# EAGLE board pck100clone (EAGLE 6.6.0)
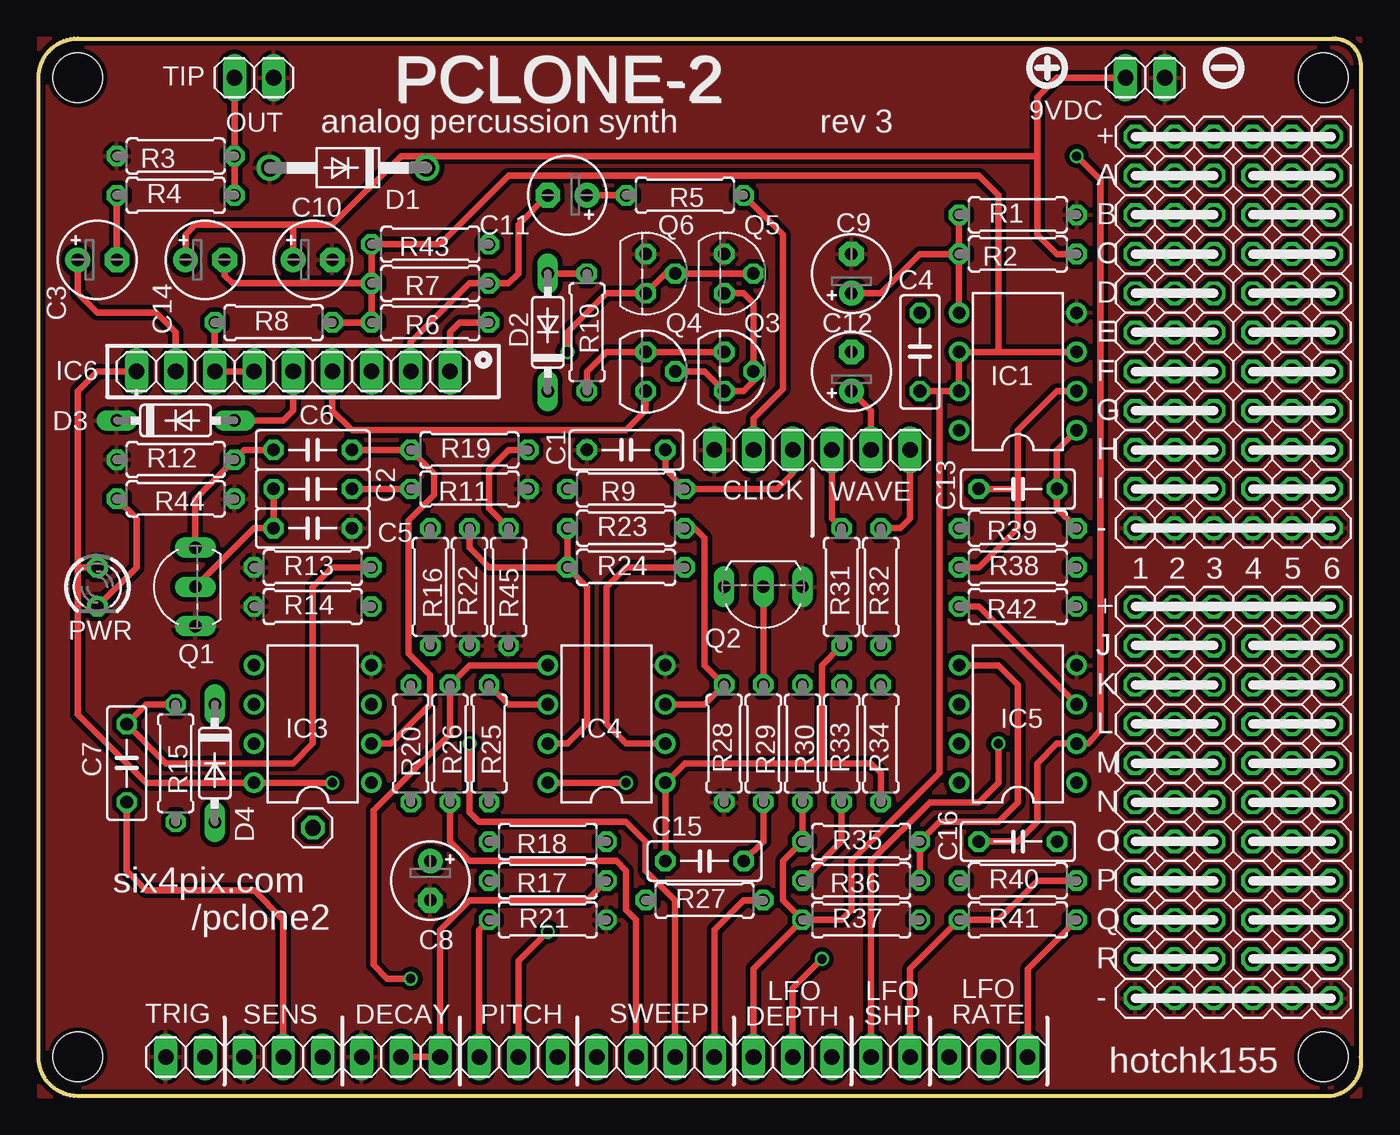
[diagram p0: board, top side]
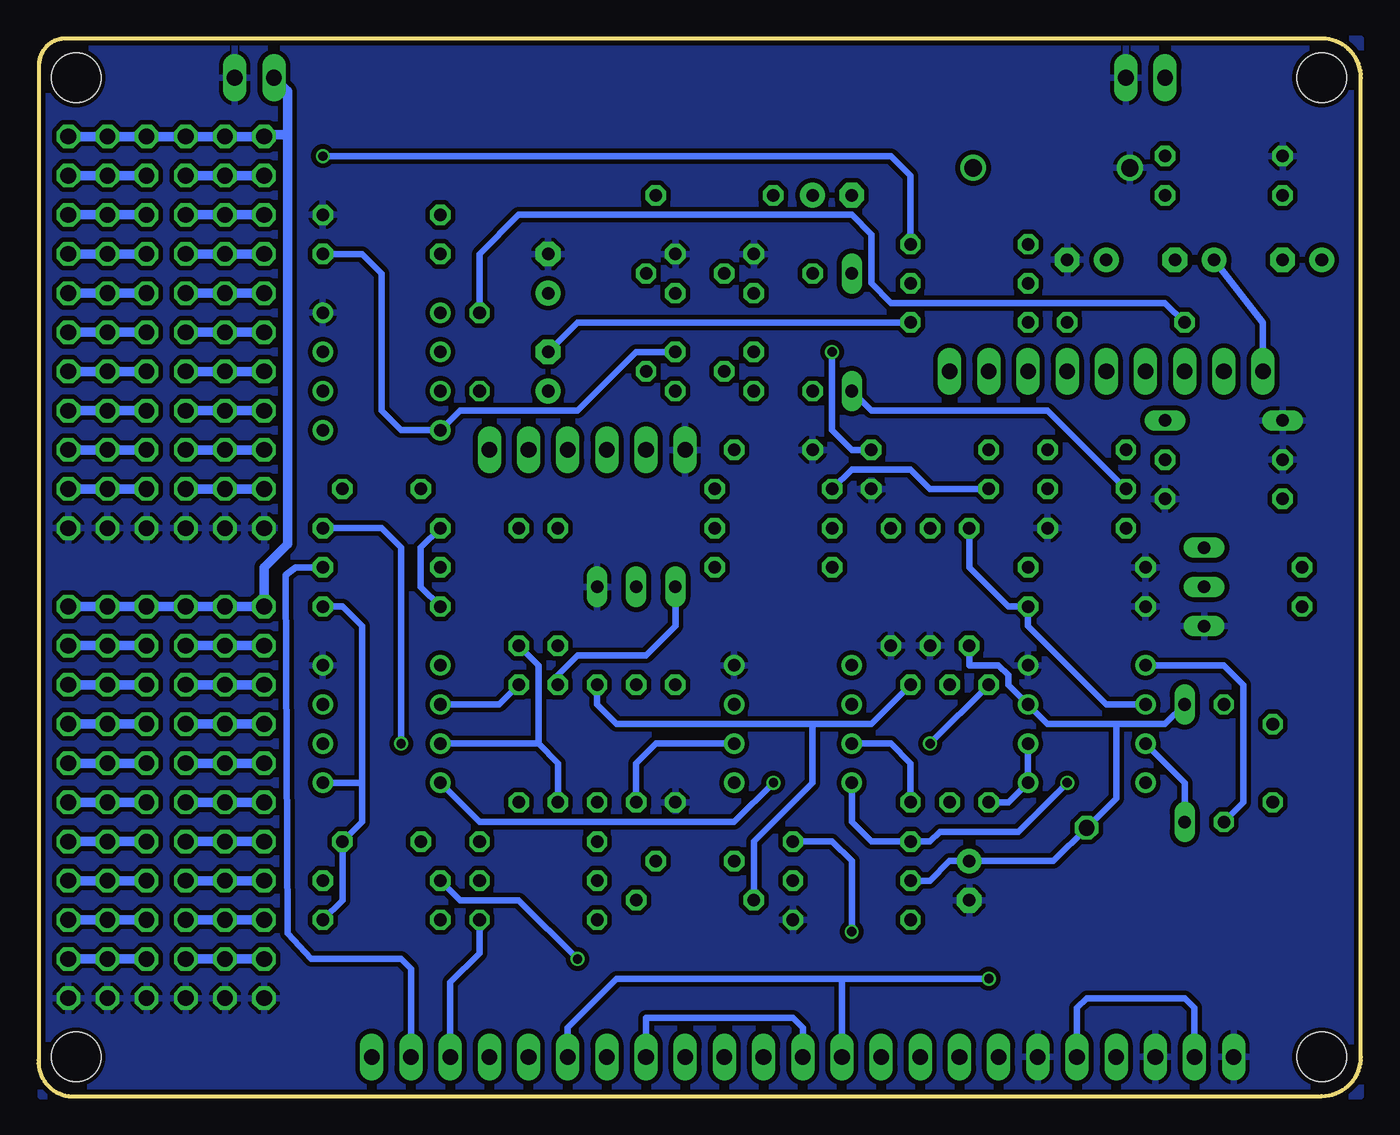
[diagram p1: board, bottom side, seen from below]

Size 85.75 x 68.58 mm. Coordinates in mm from the lower left corner, seen from the top.
Outline: 2.54,68.58 83.95,68.58 arc-90 85.72,66.93 85.72,2.54 arc-90 83.82,0 2.54,0 arc-90 0,2.54 0,66.04 arc-90 2.54,68.58
Copper layers (1*16): Top 0.035mm / dielectric 1.5mm / Bottom 0.035mm
Design rules "ITEADstudio_DRC": minimum track width 6mil, minimum drill 12mil, track to track 6mil, track to pad 6mil, pad to pad 6mil, via to via 6mil, smd to smd 0mil, copper to edge 10mil, drill to drill 10mil, minimum pad ring 10mil, minimum via ring 6mil, stop-mask expansion 2mil, vias tented up to drill 100mil, thermal gap 10mil
Holes 3.2 mm at 83.31,66.04 83.31,2.54 2.54,2.54 2.54,66.04

## Footprints (pad centres in the part's own frame; a part is rotated, then mirrored left to right if it is on the bottom)
1X02 = drill 1.016 long: 1 -1.27,0; 2 1.27,0
C050-025X075 = drill 0.813 octagon: 1 -2.54,0; 2 2.54,0
E2,5-5 = drill 0.813 pad 1.6: + -1.27,0 | drill 0.813 pad 1.6 octagon: - 1.27,0
1X03 = drill 1.016 long: 1 -2.54,0; 2 0,0; 3 2.54,0
DO41-10 = drill 1.118: A 5.08,0; C -5.08,0
DO35-7 = drill 0.813 long: A 3.81,0; C -3.81,0
DIL08 = drill 0.813 pad 1.27: 1 -3.81,-3.81; 2 -1.27,-3.81; 3 1.27,-3.81; 4 3.81,-3.81; 5 3.81,3.81; 6 1.27,3.81; 7 -1.27,3.81; 8 -3.81,3.81
1X09 = drill 1.016 long: 1 -10.16,0; 2 -7.62,0; 3 -5.08,0; 4 -2.54,0; 5 0,0; 6 2.54,0; 7 5.08,0; 8 7.62,0; 9 10.16,0
1X01 = drill 1.016 octagon: 1 0,0
LED3MM = drill 0.813 octagon: A -1.27,0; K 1.27,0
TO92-ECB = drill 0.813 long: B 2.54,0; C 0,0; E -2.54,0
TO92 = drill 0.813 octagon: 1 1.27,0; 2 0,1.905; 3 -1.27,0
0207/7 = drill 0.813 octagon: 1 -3.81,0; 2 3.81,0
1X04 = drill 1.016 long: 1 -3.81,0; 2 -1.27,0; 3 1.27,0; 4 3.81,0

## Placement (x,y rotation side)
9VDC  [1X02]  71.75,66.04 0 top
C1  .047  [C050-025X075]  38.1,41.91 0 top
C2  .047  [C050-025X075]  17.78,39.37 180 top
C3  1/50  [E2,5-5]  3.81,54.23 0 top
C4  .001  [C050-025X075]  57.15,48.26 90 top
C5  .001  [C050-025X075]  17.78,36.83 180 top
C6  .047  [C050-025X075]  17.78,41.91 180 top
C7  .001  [C050-025X075]  5.71,21.59 90 top
C8  2.2/50  [E2,5-5]  25.4,13.97 270 top
C9  10/16  [E2,5-5]  52.7,53.34 90 top
C10  100/16  [E2,5-5]  17.78,54.23 0 top
C11  1/50  [E2,5-5]  34.29,58.42 180 top
C12  1/50  [E2,5-5]  52.7,46.99 90 top
C13  .022  [C050-025X075]  63.5,39.37 0 top
C14  100/16  [E2,5-5]  10.79,54.23 0 top
C15  .001  [C050-025X075]  43.18,15.24 0 top
C16  .0033  [C050-025X075]  63.5,16.51 0 top
CLICK  [1X03]  46.35,41.91 180 top
D1  1N4004  [DO41-10]  20.07,60.2 180 top
D2  1N4148DO35-7  [DO35-7]  33.02,49.53 90 top
D3  1N4148DO35-7  [DO35-7]  8.89,43.81 0 top
D4  1N4148DO35-7  [DO35-7]  11.43,21.59 270 top
DECAY  [1X03]  23.49,2.54 0 top
DEPTH  [1X03]  48.89,2.54 180 top
IC1  LM358N  [DIL08]  63.5,46.99 90 top
IC3  LM358N  [DIL08]  17.78,24.13 90 top
IC4  LM358N  [DIL08]  36.83,24.13 90 top
IC5  LM358N  [DIL08]  63.5,24.13 90 top
IC6  [1X09]  16.51,46.99 180 top
JP1  [1X01]  17.78,17.4 0 top
JP2  [1X01]  73.66,31.75 0 top
JP3  [1X01]  76.2,31.75 0 top
JP4  [1X01]  76.2,29.21 0 top
JP5  [1X01]  71.12,29.21 0 top
JP6  [1X01]  73.66,29.21 0 top
JP7  [1X01]  71.12,31.75 0 top
JP14  [1X01]  73.66,49.53 0 top
JP15  [1X01]  76.2,49.53 0 top
JP16  [1X01]  81.28,46.99 0 top
JP17  [1X01]  83.82,46.99 0 top
JP18  [1X01]  78.74,46.99 0 top
JP19  [1X01]  71.12,49.53 0 top
JP20  [1X01]  73.66,44.45 0 top
JP21  [1X01]  76.2,44.45 0 top
JP22  [1X01]  78.74,49.53 0 top
JP23  [1X01]  81.28,49.53 0 top
JP24  [1X01]  83.82,49.53 0 top
JP25  [1X01]  71.12,44.45 0 top
JP26  [1X01]  78.74,44.45 0 top
JP27  [1X01]  81.28,44.45 0 top
JP28  [1X01]  71.12,46.99 0 top
JP29  [1X01]  73.66,46.99 0 top
JP30  [1X01]  76.2,46.99 0 top
JP31  [1X01]  83.82,44.45 0 top
JP32  [1X01]  71.12,41.91 0 top
JP33  [1X01]  73.66,41.91 0 top
JP34  [1X01]  76.2,41.91 0 top
JP35  [1X01]  78.74,41.91 0 top
JP36  [1X01]  81.28,41.91 0 top
JP37  [1X01]  83.82,41.91 0 top
JP38  [1X01]  76.2,39.37 0 top
JP39  [1X01]  71.12,39.37 0 top
JP40  [1X01]  73.66,39.37 0 top
JP41  [1X01]  78.74,39.37 0 top
JP42  [1X01]  81.28,39.37 0 top
JP43  [1X01]  83.82,39.37 0 top
JP44  [1X01]  81.28,31.75 0 top
JP45  [1X01]  83.82,31.75 0 top
JP46  [1X01]  78.74,31.75 0 top
JP47  [1X01]  71.12,36.83 0 top
JP48  [1X01]  73.66,36.83 0 top
JP49  [1X01]  78.74,36.83 0 top
JP50  [1X01]  81.28,36.83 0 top
JP51  [1X01]  83.82,36.83 0 top
JP52  [1X01]  76.2,36.83 0 top
JP53  [1X01]  78.74,29.21 0 top
JP54  [1X01]  81.28,29.21 0 top
JP55  [1X01]  83.82,29.21 0 top
JP56  [1X01]  78.74,59.69 0 top
JP57  [1X01]  81.28,59.69 0 top
JP58  [1X01]  71.12,62.23 0 top
JP59  [1X01]  73.66,62.23 0 top
JP60  [1X01]  76.2,62.23 0 top
JP61  [1X01]  83.82,59.69 0 top
JP62  [1X01]  78.74,57.15 0 top
JP63  [1X01]  81.28,57.15 0 top
JP64  [1X01]  71.12,59.69 0 top
JP65  [1X01]  73.66,59.69 0 top
JP66  [1X01]  76.2,59.69 0 top
JP67  [1X01]  83.82,57.15 0 top
JP68  [1X01]  78.74,54.61 0 top
JP69  [1X01]  81.28,54.61 0 top
JP70  [1X01]  73.66,57.15 0 top
JP71  [1X01]  71.12,57.15 0 top
JP72  [1X01]  76.2,57.15 0 top
JP73  [1X01]  83.82,54.61 0 top
JP74  [1X01]  78.74,52.07 0 top
JP75  [1X01]  81.28,52.07 0 top
JP76  [1X01]  83.82,52.07 0 top
JP77  [1X01]  71.12,54.61 0 top
JP78  [1X01]  73.66,54.61 0 top
JP79  [1X01]  76.2,54.61 0 top
JP80  [1X01]  73.66,52.07 0 top
JP81  [1X01]  71.12,52.07 0 top
JP82  [1X01]  81.28,8.89 0 top
JP83  [1X01]  83.82,8.89 0 top
JP84  [1X01]  76.2,19.05 0 top
JP85  [1X01]  76.2,8.89 0 top
JP86  [1X01]  71.12,8.89 0 top
JP87  [1X01]  73.66,8.89 0 top
JP88  [1X01]  71.12,19.05 0 top
JP89  [1X01]  78.74,8.89 0 top
JP90  [1X01]  81.28,6.35 0 top
JP91  [1X01]  83.82,6.35 0 top
JP92  [1X01]  73.66,19.05 0 top
JP93  [1X01]  76.2,6.35 0 top
JP94  [1X01]  71.12,6.35 0 top
JP95  [1X01]  73.66,6.35 0 top
JP96  [1X01]  78.74,19.05 0 top
JP97  [1X01]  78.74,6.35 0 top
JP98  [1X01]  71.12,13.97 0 top
JP99  [1X01]  73.66,13.97 0 top
JP100  [1X01]  83.82,19.05 0 top
JP101  [1X01]  83.82,13.97 0 top
JP102  [1X01]  78.74,13.97 0 top
JP103  [1X01]  81.28,13.97 0 top
JP104  [1X01]  81.28,19.05 0 top
JP105  [1X01]  76.2,13.97 0 top
JP106  [1X01]  73.66,11.43 0 top
JP107  [1X01]  76.2,11.43 0 top
JP108  [1X01]  76.2,21.59 0 top
JP109  [1X01]  83.82,11.43 0 top
JP110  [1X01]  81.28,11.43 0 top
JP111  [1X01]  78.74,11.43 0 top
JP112  [1X01]  71.12,21.59 0 top
JP113  [1X01]  71.12,11.43 0 top
JP114  [1X01]  78.74,16.51 0 top
JP115  [1X01]  81.28,16.51 0 top
JP116  [1X01]  73.66,21.59 0 top
JP117  [1X01]  76.2,16.51 0 top
JP118  [1X01]  71.12,16.51 0 top
JP119  [1X01]  73.66,16.51 0 top
JP120  [1X01]  71.12,24.13 0 top
JP121  [1X01]  83.82,16.51 0 top
JP122  [1X01]  73.66,24.13 0 top
JP123  [1X01]  76.2,24.13 0 top
JP124  [1X01]  78.74,21.59 0 top
JP125  [1X01]  81.28,21.59 0 top
JP126  [1X01]  83.82,21.59 0 top
JP127  [1X01]  78.74,26.67 0 top
JP128  [1X01]  81.28,26.67 0 top
JP129  [1X01]  73.66,26.67 0 top
JP130  [1X01]  76.2,26.67 0 top
JP131  [1X01]  71.12,26.67 0 top
JP132  [1X01]  83.82,26.67 0 top
JP133  [1X01]  81.28,24.13 0 top
JP134  [1X01]  83.82,24.13 0 top
JP135  [1X01]  78.74,24.13 0 top
JP136  [1X01]  76.2,52.07 0 top
JP143  [1X01]  81.28,62.23 0 top
JP144  [1X01]  83.82,62.23 0 top
JP145  [1X01]  78.74,62.23 0 top
OUT  [1X02]  13.97,66.04 0 top
PITCH  [1X03]  31.12,2.54 0 top
PWR  [LED3MM]  3.81,33.02 270 top
Q1  2SC945  [TO92-ECB]  10.16,33.02 90 top
Q2  2SC945  [TO92-ECB]  46.99,33.02 180 top
Q3  2N3906  [TO92]  44.45,46.99 270 top
Q4  2N3906  [TO92]  39.37,46.99 270 top
Q5  2N3904  [TO92]  44.45,53.34 270 top
Q6  2N3904  [TO92]  39.37,53.34 270 top
R1  47k  [0207/7]  63.5,57.15 0 top
R2  47k  [0207/7]  63.5,54.61 180 top
R3  10k  [0207/7]  8.89,60.96 180 top
R4  47k  [0207/7]  8.89,58.42 0 top
R5  47k  [0207/7]  41.91,58.42 180 top
R6  1k  [0207/7]  25.4,50.16 180 top
R7  1k  [0207/7]  25.4,52.7 180 top
R8  33k  [0207/7]  15.24,50.16 0 top
R9  100k  [0207/7]  38.1,39.37 180 top
R10  1m  [0207/7]  35.56,49.53 270 top
R11  100k  [0207/7]  27.94,39.37 180 top
R12  100k  [0207/7]  8.89,41.27 0 top
R13  22k  [0207/7]  17.78,34.29 0 top
R14  4k7  [0207/7]  17.78,31.75 0 top
R15  10k  [0207/7]  8.89,21.59 270 top
R16  4m7  [0207/7]  25.4,33.02 270 top
R17  1k  [0207/7]  33.02,13.97 180 top
R18  56k  [0207/7]  33.02,16.51 180 top
R19  33k  [0207/7]  27.94,41.91 0 top
R20  4k7  [0207/7]  24.13,22.86 270 top
R21  1k  [0207/7]  33.02,11.43 0 top
R22  4k7  [0207/7]  27.94,33.02 90 top
R23  47k  [0207/7]  38.1,36.83 0 top
R24  100k  [0207/7]  38.1,34.29 0 top
R25  100k  [0207/7]  29.21,22.86 270 top
R26  22k  [0207/7]  26.67,22.86 270 top
R27  22k  [0207/7]  43.18,12.7 0 top
R28  47k  [0207/7]  44.45,22.86 90 top
R29  47k  [0207/7]  46.99,22.86 270 top
R30  100k  [0207/7]  49.53,22.86 270 top
R31  100k  [0207/7]  52.07,33.02 90 top
R32  220k  [0207/7]  54.61,33.02 90 top
R33  47k  [0207/7]  52.07,22.86 90 top
R34  47k  [0207/7]  54.61,22.86 90 top
R35  100k  [0207/7]  53.34,16.51 0 top
R36  100k  [0207/7]  53.34,13.97 180 top
R37  330  [0207/7]  53.34,11.43 180 top
R38  47k  [0207/7]  63.5,34.29 0 top
R39  22k  [0207/7]  63.5,36.83 180 top
R40  100k  [0207/7]  63.5,13.97 0 top
R41  47k  [0207/7]  63.5,11.43 0 top
R42  47k  [0207/7]  63.5,31.75 180 top
R43  22k  [0207/7]  25.4,55.24 180 top
R44  4k7  [0207/7]  8.89,38.73 180 top
R45  4k7  [0207/7]  30.48,33.02 270 top
RATE  [1X03]  61.59,2.54 180 top
SENS  [1X03]  15.88,2.54 180 top
SHP  [1X02]  55.25,2.54 0 top
SWEEP  [1X04]  40.01,2.54 0 top
TRIG  [1X02]  9.52,2.54 0 top
WAVE  [1X03]  53.98,41.91 0 top

## Library data of the parts
9VDC CLICK DECAY DEPTH IC6 JP1-JP7 JP14-JP136 JP143-JP145 OUT PITCH RATE SENS SHP SWEEP TRIG WAVE = pinhead
C1-C16 R1-R45 = rcl
D1-D4 = diode
IC1 IC3-IC5 = linear
PWR = led
Q1 Q2 Q5 Q6 = transistor
Q3 Q4 = transistor-pnp

## Nets
ATTACK_OUT: CLICK.2 R5.1
BA662_1: Q5.2 Q6.1 Q6.2 R19.2 R45.1
BA662_2: C11.- IC6.2 R7.1
BA662_5: D3.A IC6.5
BA662_6_7: C4.2 IC6.6 IC6.7 R8.1
BA662_8: C3.+ IC6.8
GND: 9VDC.2 C1.1 C5.1 C8.- C9.- C10.- CLICK.3 D1.A D3.C DECAY.1 IC1.4 IC3.4 IC4.4 IC5.4 JP47.1 JP48.1 JP49.1 JP50.1 JP51.1 JP52.1 JP90.1 JP91.1 JP93.1 JP94.1 JP95.1 JP97.1 OUT.2 Q1.E Q2.E Q5.3 Q6.3 R1.2 R3.2 R11.1 R12.1 R13.1 R14.1 R21.2 R22.1 R28.1 R44.1 R45.2 SENS.3 TRIG.1
MOD_OUT: R40.2 R41.1 SHP.2
N$1: SENS.1 TRIG.2
N$3: C7.1 SENS.2
N$4: C7.2 R13.2 R15.1
N$5: IC3.5 R15.2
N$6: IC3.6 R14.2 R16.1
N$7: D4.A IC3.7
N$8: C8.+ D4.C IC3.3 JP1.1 R16.2 R17.2
N$9: DECAY.2 DECAY.3 R17.1
N$10: C6.2 Q1.B R12.2
N$11: C2.2 C5.2 D2.C Q1.C
N$12: D2.A R10.1
N$13: C2.1 R9.2 R11.2
N$14: C1.2 CLICK.1 R9.1
N$15: C13.2 IC1.1 R39.1 SHP.1
N$16: C13.1 IC1.2 R38.1
N$17: R38.2 RATE.2
N$18: JP4.1 JP5.1 JP6.1
N$19: C16.1 IC5.2 R43.1
N$20: C16.2 IC5.1 R41.2 R42.1 RATE.1
N$21: R20.1 SWEEP.3
N$22: R37.1 RATE.3
N$23: IC5.3 R39.2 R42.2
N$24: R27.2 SWEEP.4
N$25: R26.2 SWEEP.2
N$26: IC4.6 R25.1 R27.1 R30.1
N$27: DEPTH.1 IC4.5 PITCH.3 R26.1
N$28: DEPTH.2 R40.1
N$29: PITCH.2 R18.1
N$30: PITCH.1 R21.1
N$31: C9.+ IC1.5 R1.1 R2.2
N$32: IC4.7 R22.2 R23.1 R24.1 R25.2
N$33: IC4.3 R23.2 R28.2
N$34: C15.2 IC4.2 R24.2 R29.2
N$35: Q2.C R29.1
N$36: Q2.B R33.2
N$37: C15.1 IC4.1 R31.1 R34.1
N$38: IC5.6 R34.2
N$39: R31.2 WAVE.1
N$40: IC5.7 R32.1 R33.1 R36.2
N$41: R32.2 WAVE.3
N$42: IC5.5 R35.2 R36.1
N$43: C12.+ WAVE.2
N$44: PWR.K R44.2
N$45: IC6.4 Q4.1
N$47: C11.+ R5.2
N$48: Q3.1 Q3.2 Q4.2 Q5.1
N$50: JP14.1 JP15.1 JP19.1
N$51: C3.- R4.1
N$52: JP16.1 JP17.1 JP18.1
N$53: JP20.1 JP21.1 JP25.1
N$54: JP22.1 JP23.1 JP24.1
N$55: JP26.1 JP27.1 JP31.1
N$56: JP28.1 JP29.1 JP30.1
N$57: JP32.1 JP33.1 JP34.1
N$58: JP35.1 JP36.1 JP37.1
N$59: JP38.1 JP39.1 JP40.1
N$60: JP41.1 JP42.1 JP43.1
N$64: JP53.1 JP54.1 JP55.1
N$65: JP56.1 JP57.1 JP61.1
N$67: JP62.1 JP63.1 JP67.1
N$68: JP64.1 JP65.1 JP66.1
N$69: JP68.1 JP69.1 JP73.1
N$70: JP70.1 JP71.1 JP72.1
N$71: JP74.1 JP75.1 JP76.1
N$72: JP77.1 JP78.1 JP79.1
N$73: JP80.1 JP81.1 JP136.1
N$89: JP98.1 JP99.1 JP105.1
N$90: JP82.1 JP83.1 JP89.1
N$91: JP85.1 JP86.1 JP87.1
N$92: JP101.1 JP102.1 JP103.1
N$93: JP106.1 JP107.1 JP113.1
N$94: JP109.1 JP110.1 JP111.1
N$95: JP114.1 JP115.1 JP121.1
N$96: JP117.1 JP118.1 JP119.1
N$97: JP84.1 JP88.1 JP92.1
N$98: JP96.1 JP100.1 JP104.1
N$99: JP108.1 JP112.1 JP116.1
N$100: JP120.1 JP122.1 JP123.1
N$101: JP124.1 JP125.1 JP126.1
N$102: JP127.1 JP128.1 JP132.1
N$103: JP129.1 JP130.1 JP131.1
N$104: JP133.1 JP134.1 JP135.1
OUT: OUT.1 R3.1 R4.2
TRIGGER: C6.1 IC3.1 IC3.2 R19.1 R20.2
VCC: 9VDC.1 C10.+ C14.+ D1.C IC1.8 IC3.8 IC4.8 IC5.8 IC6.9 JP2.1 JP3.1 JP7.1 JP44.1 JP45.1 JP46.1 JP58.1 JP59.1 JP60.1 JP143.1 JP144.1 JP145.1 PWR.A Q3.3 Q4.3 R2.1 R10.2 R18.2
VCO_OUT: C12.- IC6.1 R6.1
VGND: C4.1 C14.- DEPTH.3 IC1.3 IC1.6 IC1.7 R6.2 R7.2 R8.2 R30.2 R35.1 R37.2 R43.2 SWEEP.1

## Tracks (layer width: path | path; a pad name or v marks a point on that pad's centre or on a via)
ATTACK_OUT
  Top 0.406: R5.1 48.26,55.88 48.26,45.85 46.35,43.94 CLICK.2
BA662_1  (via drill 0.6)
  Top 0.406: Q5.2 Q6.2 40.64,53.34 Q6.1 36.83,52.07 34.29,49.53 v34.29,48.26 | R19.2 30.48,41.91 29.21,40.64 29.21,38.1 R45.1
  Bottom 0.406: R19.2 33.02,41.91 34.29,43.18 v34.29,48.26
BA662_2
  Top 0.406: IC6.2 24.13,48.89 27.94,52.7 R7.1 30.48,52.7 31.12,53.34 31.12,56.51 C11.-
BA662_5
  Top 0.406: D3.A 15.88,43.81 16.51,44.45 IC6.5
BA662_6_7
  Top 0.406: R8.1 IC6.7 IC6.6
  Bottom 0.406: C4.2 57.15,54.61 54.61,57.15 33.02,57.15 31.75,55.88 31.75,52.7 30.48,51.43 12.7,51.43 R8.1
BA662_8
  Top 0.406: IC6.8 8.89,49.53 7.62,50.8 3.81,50.8 2.54,52.07 C3.+
GND
  pour Bottom (isolate 0.305): 0,68.58 85.72,68.58 85.6,0 0,0
  pour Top (isolate 0.305): 0,68.58 0,0 85.72,0 85.72,68.58
MOD_OUT
  Top 0.406: R40.2 64.77,13.97 62.23,11.43 R41.1 56.52,8.26 SHP.2
N$1
  Bottom 0.406: TRIG.2 10.79,5.71 11.43,6.35 17.78,6.35 18.41,5.71 SENS.1
N$3
  Top 0.406: C7.1 5.71,14.61 6.98,13.34 13.97,13.34 15.88,11.43 SENS.2
N$4
  Top 0.406: R15.1 6.98,25.4 C7.2 8.25,21.59 16.51,21.59 17.78,22.86 17.78,33.02 19.05,34.29 R13.2
N$5
  Bottom 0.406: IC3.5 8.89,27.94 7.62,26.67 7.62,19.05 R15.2
N$6
  Bottom 0.406: IC3.6 16.51,25.4 21.59,30.48 R14.2 22.86,31.75 25.4,34.29 R16.1
N$7
  Bottom 0.406: D4.A 11.43,20.32 IC3.7
N$8
  Bottom 0.406: 15.88,24.13 20.32,24.13 IC3.3 22.86,26.67 22.86,27.3 23.49,27.94 25.4,27.94 R16.2 | 15.88,24.13 12.7,24.13 D4.C | R17.2 27.94,13.97 26.67,15.24 C8.+ 19.94,15.24 JP1.1 15.88,19.3 15.88,24.13
N$9
  Top 0.406: DECAY.2 DECAY.3 26.03,10.79 27.94,12.7 35.56,12.7 R17.1
N$10
  Top 0.406: C6.2 13.34,41.91 R12.2 10.16,38.73 Q1.B
N$11
  Top 0.406: C2.2 C5.2 13.97,36.83 Q1.C
  Bottom 0.406: C2.2 20.32,44.45 31.75,44.45 D2.C
N$12
  Top 0.406: D2.A R10.1
N$13
  Top 0.406: C2.1 R11.2
  Bottom 0.406: R11.2 27.94,39.37 29.21,40.64 33.02,40.64 R9.2
N$14
  Top 0.406: C1.2 40.64,40.64 R9.1 47.88,39.37 48.89,40.39 CLICK.1
N$15  (via drill 0.6)
  Top 0.406: v62.23,22.86 62.23,20.32 60.96,19.05 57.78,19.05 53.98,15.24 SHP.1 | R39.1 66.04,38.1 C13.2 66.04,41.91 IC1.1
  Bottom 0.406: v62.23,22.86 62.23,35.56 63.5,36.83 R39.1
N$16
  Top 0.406: R38.1 60.96,34.29 63.5,36.83 63.5,39.37 | 63.5,39.37 63.5,43.18 66.04,45.72 IC1.2 | C13.1 63.5,39.37
N$17
  Bottom 0.406: R38.2 69.09,34.29 69.72,33.78 69.6,10.54 68.07,8.89 62.23,8.89 61.59,8.26 RATE.2
N$18
  Bottom 0.61: JP5.1 JP6.1 JP4.1
N$19  (via drill 0.6)
  Top 0.406: C16.1 63.5,16.51 64.77,17.78 64.77,21.59 66.04,22.86 IC5.2 68.07,22.86 68.83,23.75 68.83,59.44 v67.31,60.96
  Bottom 0.406: v67.31,60.96 30.48,60.96 29.21,59.69 R43.1
N$20
  Top 0.406: RATE.1 64.14,8.26 R41.2
  Bottom 0.406: 64.77,20.32 64.77,17.78 C16.2 66.04,12.7 R41.2 | 64.77,20.32 64.77,30.48 66.04,31.75 R42.1 | IC5.1 64.77,20.32
N$21  (via drill 0.6)
  Top 0.406: v27.94,22.86 27.94,18.41 28.58,17.78 38.1,17.78 39.37,16.51 39.37,14.61 41.27,12.7 SWEEP.3
  Bottom 0.406: v27.94,22.86 R20.1
N$22
  Bottom 0.406: RATE.3 59.05,7.37 57.15,9.27 R37.1
N$23
  Top 0.406: R42.2 60.96,31.75 IC5.3
  Bottom 0.406: R42.2 60.96,33.02 60.96,35.56 R39.2
N$24
  Top 0.406: SWEEP.4 43.81,10.79 45.72,12.7 R27.2
N$25
  Top 0.406: R26.2 26.67,16.51 27.94,15.24 37.46,15.24 38.1,14.61 38.1,12.07 38.73,11.43 SWEEP.2
N$26
  Top 0.406: IC4.6 30.48,25.4 R25.1
  Bottom 0.406: R25.1 31.75,24.13 35.56,24.13 | R30.1 49.53,25.4 48.26,24.13 35.56,24.13 | R27.1 39.37,16.51 35.56,20.32 35.56,24.13
N$27  (via drill 0.6)
  Top 0.406: IC4.5 27.94,27.94 R26.1 26.67,23.5 21.72,18.54 21.72,8.51 22.61,7.62 v24.13,7.62
  Bottom 0.406: DEPTH.1 51.44,4.45 48.26,7.62 33.66,7.62 | 33.66,7.62 v24.13,7.62 | PITCH.3 33.66,7.62
N$28  (via drill 0.6)
  Top 0.406: DEPTH.2 48.89,6.99 v50.8,8.89
  Bottom 0.406: R40.1 58.42,12.7 54.61,12.7 v50.8,8.89
N$29  (via drill 0.6)
  Top 0.406: PITCH.2 31.12,8.76 31.5,9.14 v33.02,10.67
  Bottom 0.406: R18.1 34.29,16.51 33.02,15.24 v33.02,10.67
N$30
  Top 0.406: R21.1 28.58,10.79 PITCH.1
N$31
  Top 0.406: R2.2 IC1.5 | R2.2 R1.1 | C9.+ 54.61,52.07 57.15,54.61 R2.2
N$32
  Top 0.406: IC4.7 34.29,22.86 35.56,24.13 35.56,33.02 R24.1 | R23.1 R24.1 | R22.2 27.94,35.56 29.21,34.29 R24.1
  Bottom 0.406: R25.2 29.21,21.59 30.48,22.86 IC4.7
N$33
  Top 0.406: IC4.3 43.18,25.4 R28.2 43.18,27.94 43.18,36.2 42.55,36.83 R23.2
N$34
  Top 0.406: R29.2 46.99,16.51 C15.2 | R24.2 38.1,34.29 36.83,33.02 36.83,24.13 38.1,22.86 IC4.2
  Bottom 0.406: IC4.2 45.72,22.86 46.99,21.59 R29.2
N$35
  Top 0.406: R29.1 Q2.C
N$36
  Bottom 0.406: Q2.B 44.45,30.48 46.35,28.57 50.8,28.57 52.07,27.3 R33.2
N$37
  Top 0.406: 50.8,21.59 41.91,21.59 IC4.1 C15.1 | 50.8,21.59 53.98,21.59 54.61,20.96 R34.1 | R31.1 50.8,27.94 50.8,21.59
N$38
  Bottom 0.406: IC5.6 55.88,25.4 R34.2
N$39
  Top 0.406: WAVE.1 51.44,37.46 R31.2
N$40
  Top 0.406: R33.1 52.07,16.51 R36.2
  Bottom 0.406: IC5.7 53.34,22.86 | 53.34,22.86 52.07,21.59 R33.1 | R32.1 53.34,27.94 53.34,22.86
N$41
  Top 0.406: WAVE.3 56.52,37.46 55.88,36.83 R32.2
N$42
  Top 0.406: R36.1 R35.2 58.42,17.78 62.23,17.78 63.5,19.05 63.5,26.67 62.23,27.94 IC5.5
N$43
  Top 0.406: WAVE.2 53.98,44.45 C12.+
N$44
  Top 0.406: PWR.K 6.35,34.29 6.35,37.46 R44.2
N$45
  Top 0.406: Q4.1 39.37,44.45 38.1,43.18 20.32,43.18 19.05,44.45 IC6.4
N$47
  Top 0.406: C11.+ R5.2
N$48
  Top 0.406: Q4.2 43.18,46.99 Q3.1 45.72,45.72 46.35,46.35 Q3.2 46.35,51.43 45.72,52.07 Q5.1
N$50
  Bottom 0.61: JP19.1 JP14.1 JP15.1
N$51
  Top 0.406: C3.- R4.1
N$52
  Bottom 0.61: JP18.1 JP16.1 JP17.1
N$53
  Bottom 0.61: JP25.1 JP20.1 JP21.1
N$54
  Bottom 0.61: JP22.1 JP23.1 JP24.1
N$55
  Bottom 0.61: JP26.1 JP27.1 JP31.1
N$56
  Bottom 0.61: JP28.1 JP29.1 JP30.1
N$57
  Bottom 0.61: JP32.1 JP33.1 JP34.1
N$58
  Bottom 0.61: JP35.1 JP36.1 JP37.1
N$59
  Bottom 0.61: JP39.1 JP40.1 JP38.1
N$60
  Bottom 0.61: JP41.1 JP42.1 JP43.1
N$64
  Bottom 0.61: JP53.1 JP54.1 JP55.1
N$65
  Bottom 0.61: JP56.1 JP57.1 JP61.1
N$67
  Bottom 0.61: JP62.1 JP63.1 JP67.1
N$68
  Bottom 0.61: JP64.1 JP65.1 JP66.1
N$69
  Bottom 0.61: JP68.1 JP69.1 JP73.1
N$70
  Bottom 0.61: JP71.1 JP70.1 JP72.1
N$71
  Bottom 0.61: JP74.1 JP75.1 JP76.1
N$72
  Bottom 0.61: JP77.1 JP78.1 JP79.1
N$73
  Bottom 0.61: JP81.1 JP80.1 JP136.1
N$89
  Bottom 0.61: JP98.1 JP99.1 JP105.1
N$90
  Bottom 0.61: JP89.1 JP82.1 JP83.1
N$91
  Bottom 0.61: JP86.1 JP87.1 JP85.1
N$92
  Bottom 0.61: JP102.1 JP103.1 JP101.1
N$93
  Bottom 0.61: JP113.1 JP106.1 JP107.1
N$94
  Bottom 0.61: JP111.1 JP110.1 JP109.1
N$95
  Bottom 0.61: JP114.1 JP115.1 JP121.1
N$96
  Bottom 0.61: JP118.1 JP119.1 JP117.1
N$97
  Bottom 0.61: JP88.1 JP92.1 JP84.1
N$98
  Bottom 0.61: JP96.1 JP104.1 JP100.1
N$99
  Bottom 0.61: JP112.1 JP116.1 JP108.1
N$100
  Bottom 0.61: JP120.1 JP122.1 JP123.1
N$101
  Bottom 0.61: JP124.1 JP125.1 JP126.1
N$102
  Bottom 0.61: JP127.1 JP128.1 JP132.1
N$103
  Bottom 0.61: JP131.1 JP129.1 JP130.1
N$104
  Bottom 0.61: JP135.1 JP133.1 JP134.1
OUT
  Top 0.406: R4.2 R3.1 OUT.1
TRIGGER
  Top 0.406: C6.1 R19.1 25.65,40.39 25.65,38.99 24,37.34 24,28.7 25.4,27.3 25.4,25.4 22.86,22.86 IC3.2
  Bottom 0.406: R20.2 22.86,19.05 IC3.1 IC3.2
VCC  (via drill 0.6)
  Top 0.406: Q3.3 Q4.3 36.83,48.26 35.56,46.99 R10.2 | IC6.9 3.81,46.99 2.54,45.72 2.54,34.29 | 16.51,56.51 10.16,56.51 9.52,55.88 C14.+ | 16.51,56.51 19.05,56.51 23.49,60.96 25.4,60.96 | 15.24,20.32 IC3.8 | PWR.A 2.54,34.29 | C10.+ 16.51,56.51 | R2.1 66.04,54.61 64.77,55.88 64.77,60.96 | v38.1,20.32 IC4.8 | v19.05,20.32 IC3.8 | 2.54,34.29 2.54,24.77 6.98,20.32 IC3.8 | 25.4,60.96 64.77,60.96 | D1.C 25.15,60.71 25.4,60.96 | 64.77,60.96 64.77,64.77 66.04,66.04 9VDC.1
  Bottom 0.406: IC6.9 6.35,50.16 C14.+ | R2.1 64.77,54.61 63.5,53.34 63.5,44.45 62.23,43.18 IC1.8 58.42,44.45 50.8,44.45 46.99,48.26 Q3.3 | IC5.8 57.15,17.78 40.64,17.78 v38.1,20.32 | IC4.8 33.02,17.78 31.75,16.51 R18.2 27.94,16.51 27.3,17.14 22.22,17.14 v19.05,20.32
  Bottom 0.61: JP144.1 JP143.1 JP145.1 JP60.1 JP59.1 JP58.1 71.12,62.36 69.72,62.36 69.6,62.23 | JP45.1 JP44.1 JP46.1 JP3.1 JP2.1 JP7.1 71.12,34.29 69.6,35.81 69.6,62.23 | 69.6,62.23 69.6,65.15 9VDC.1
VCO_OUT
  Top 0.406: R6.1 27.3,50.16 26.67,49.53 IC6.1
  Bottom 0.406: R6.1 50.8,50.16 C12.-
VGND
  Top 0.406: R30.2 R35.1 48.26,15.24 48.26,12.7 R37.2 | C4.1 58.42,45.72 | 58.42,45.72 IC1.7 IC1.6 62.23,48.26 | R8.2 R6.2 R7.2 | 62.23,48.26 IC1.3 | R7.2 12.57,52.7 12.06,53.21 C14.- | R7.2 R43.2 26.03,55.24 30.48,59.69 60.96,59.69 62.23,58.42 62.23,48.26 | 58.42,45.72 58.42,20.96 52.7,15.24 52.7,12.07 52.07,11.43 R37.2 | DEPTH.3 46.35,8.26 R37.2
  Bottom 0.406: SWEEP.1 36.2,4.45 36.83,5.08 46.35,5.08 DEPTH.3

## Text on the board
tPlace: TIP | PCLONE-2 | PCLONE-2 | analog percussion synth | rev 3 | + | A | B | C | D | E | F | G | H | WAVE | I | - | 1 | 2 | 3 | 4 | 5 | 6 | + | J | J | K | L | M | N | O | six4pix.com | P | /pclone2 | Q | R | LFO | LFO | LFO | - | hotchk155